# Altium PCB Stamp.PcbDoc
Units mm, origin at the board's own origin, x right, y up, seen from the top; angles counter-clockwise.
Board outline 27.56 x 27.81 mm, 4 copper layers (Top Layer, Int1 (GND), Int2 (PWR), Bottom Layer), stack 1.369 mm thick; 25 components, 37 nets, 122 pads, 64 vias.
Unrouted connection lines stored in the file: 28.
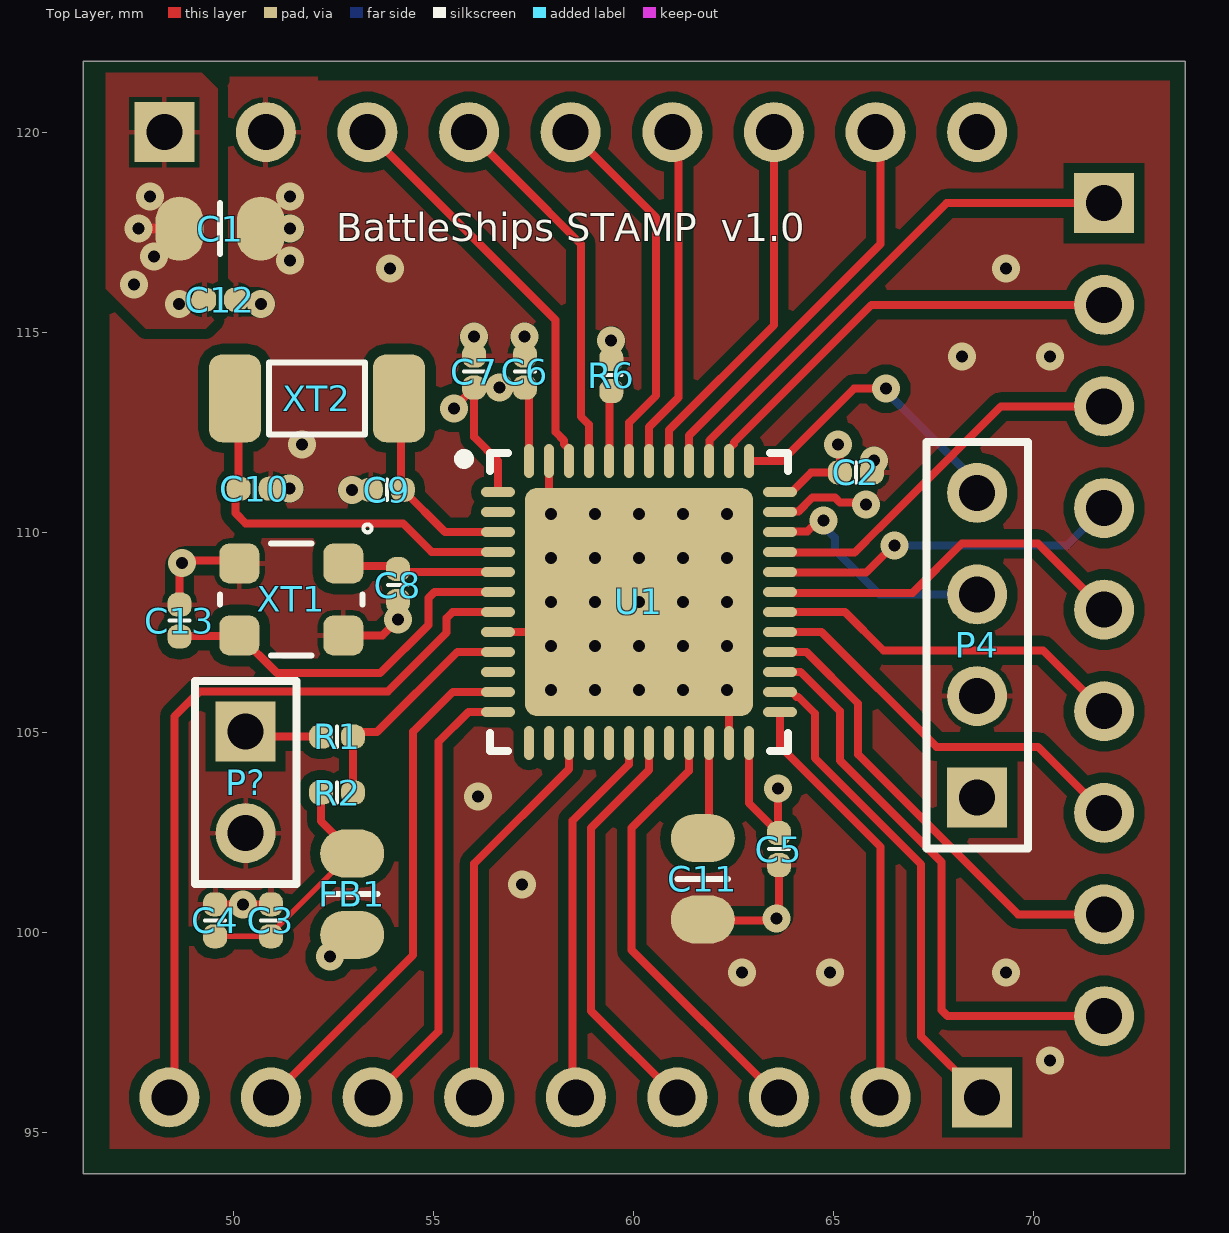
[diagram p0: Top Layer view]
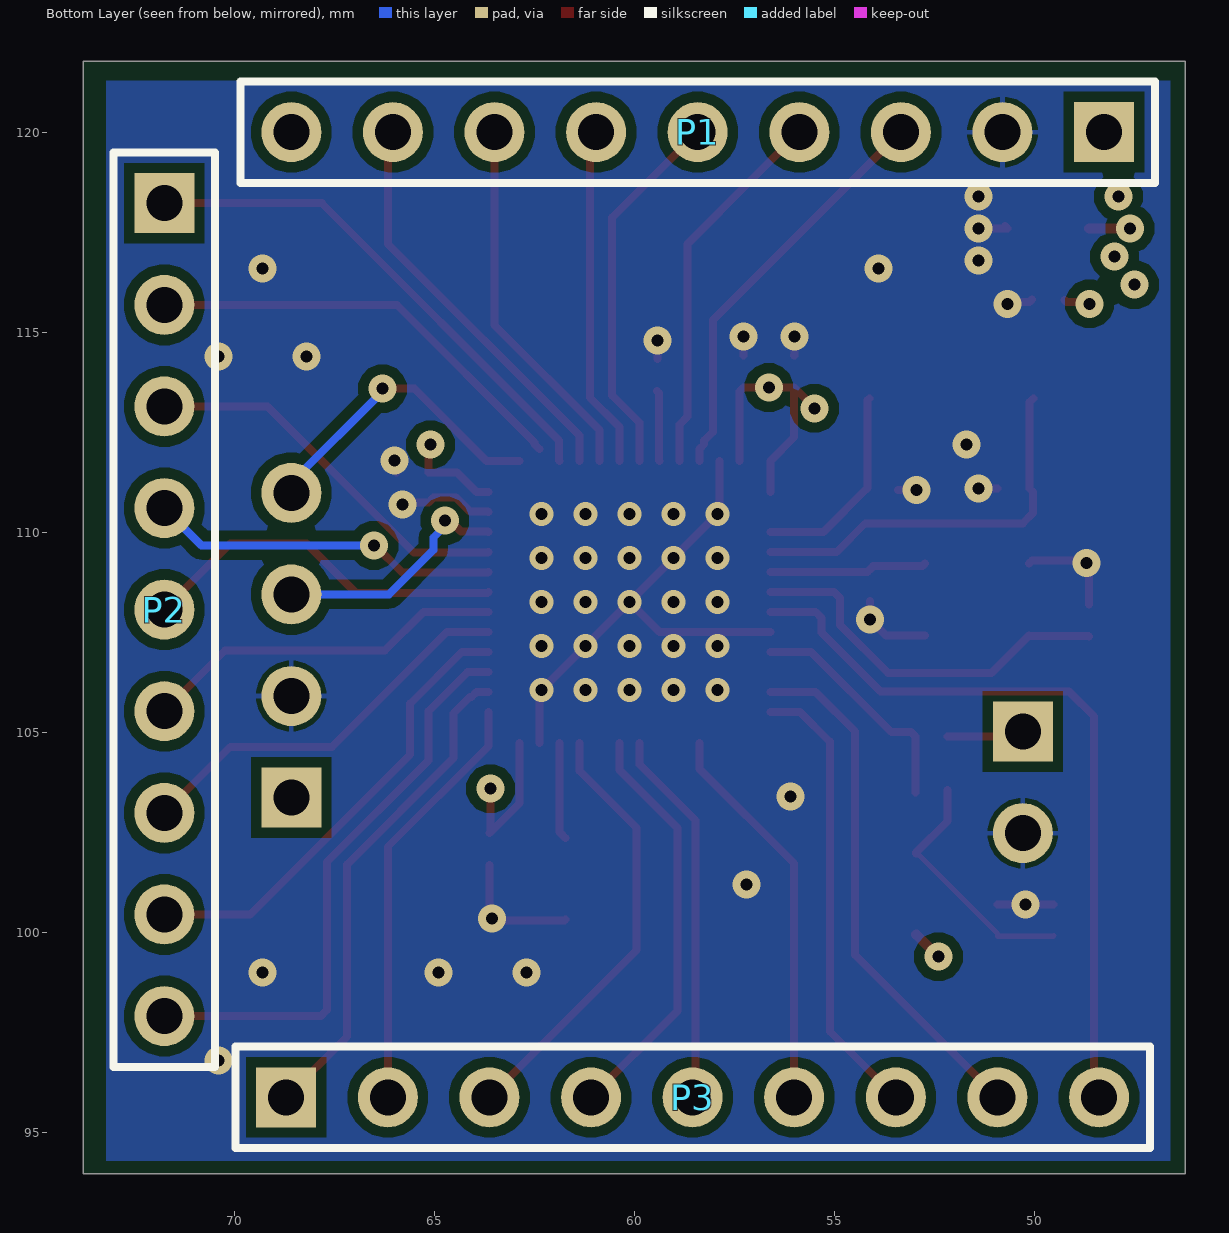
[diagram p1: Bottom Layer view, seen from below]
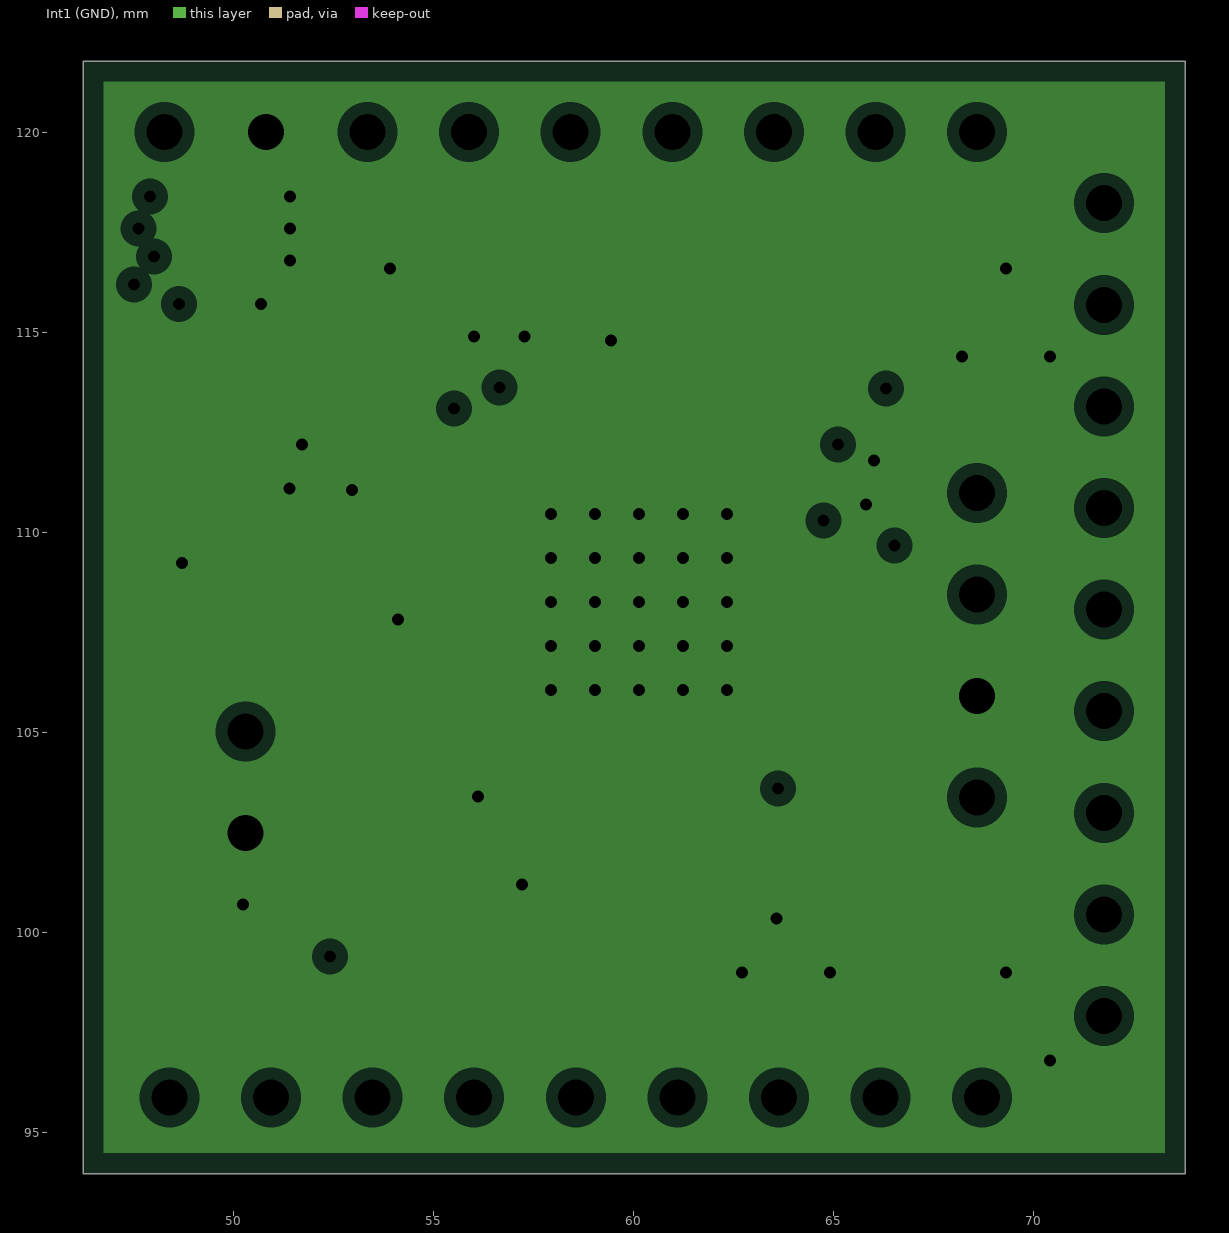
[diagram p2: Int1 (GND), clearances drawn from the general rule]
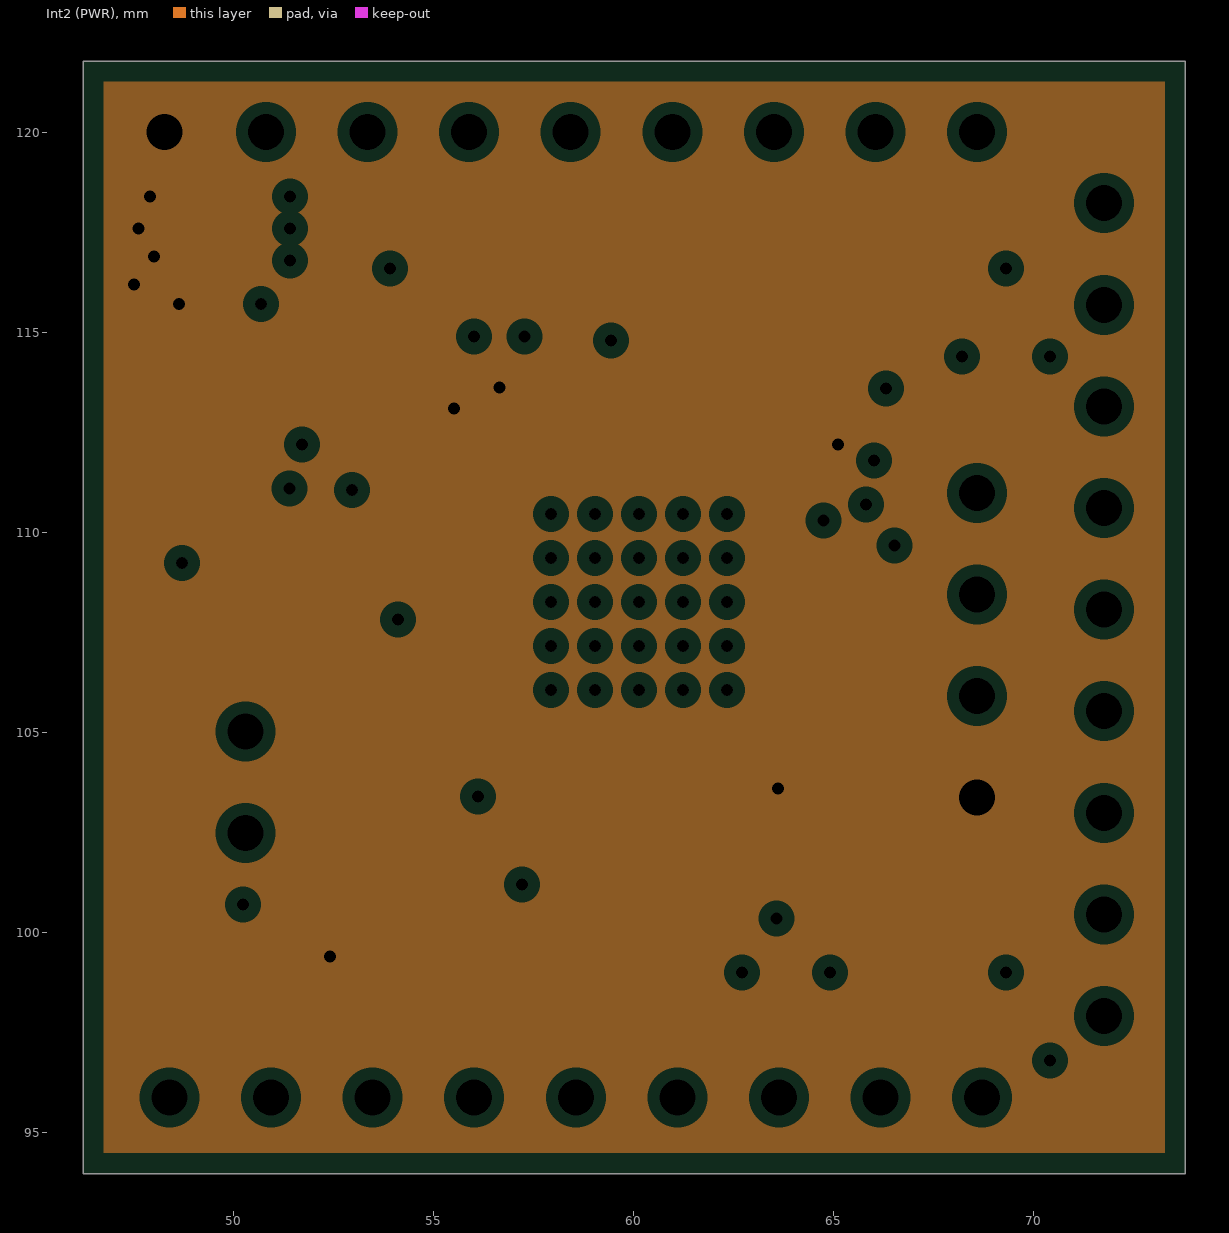
[diagram p3: Int2 (PWR), clearances drawn from the general rule]
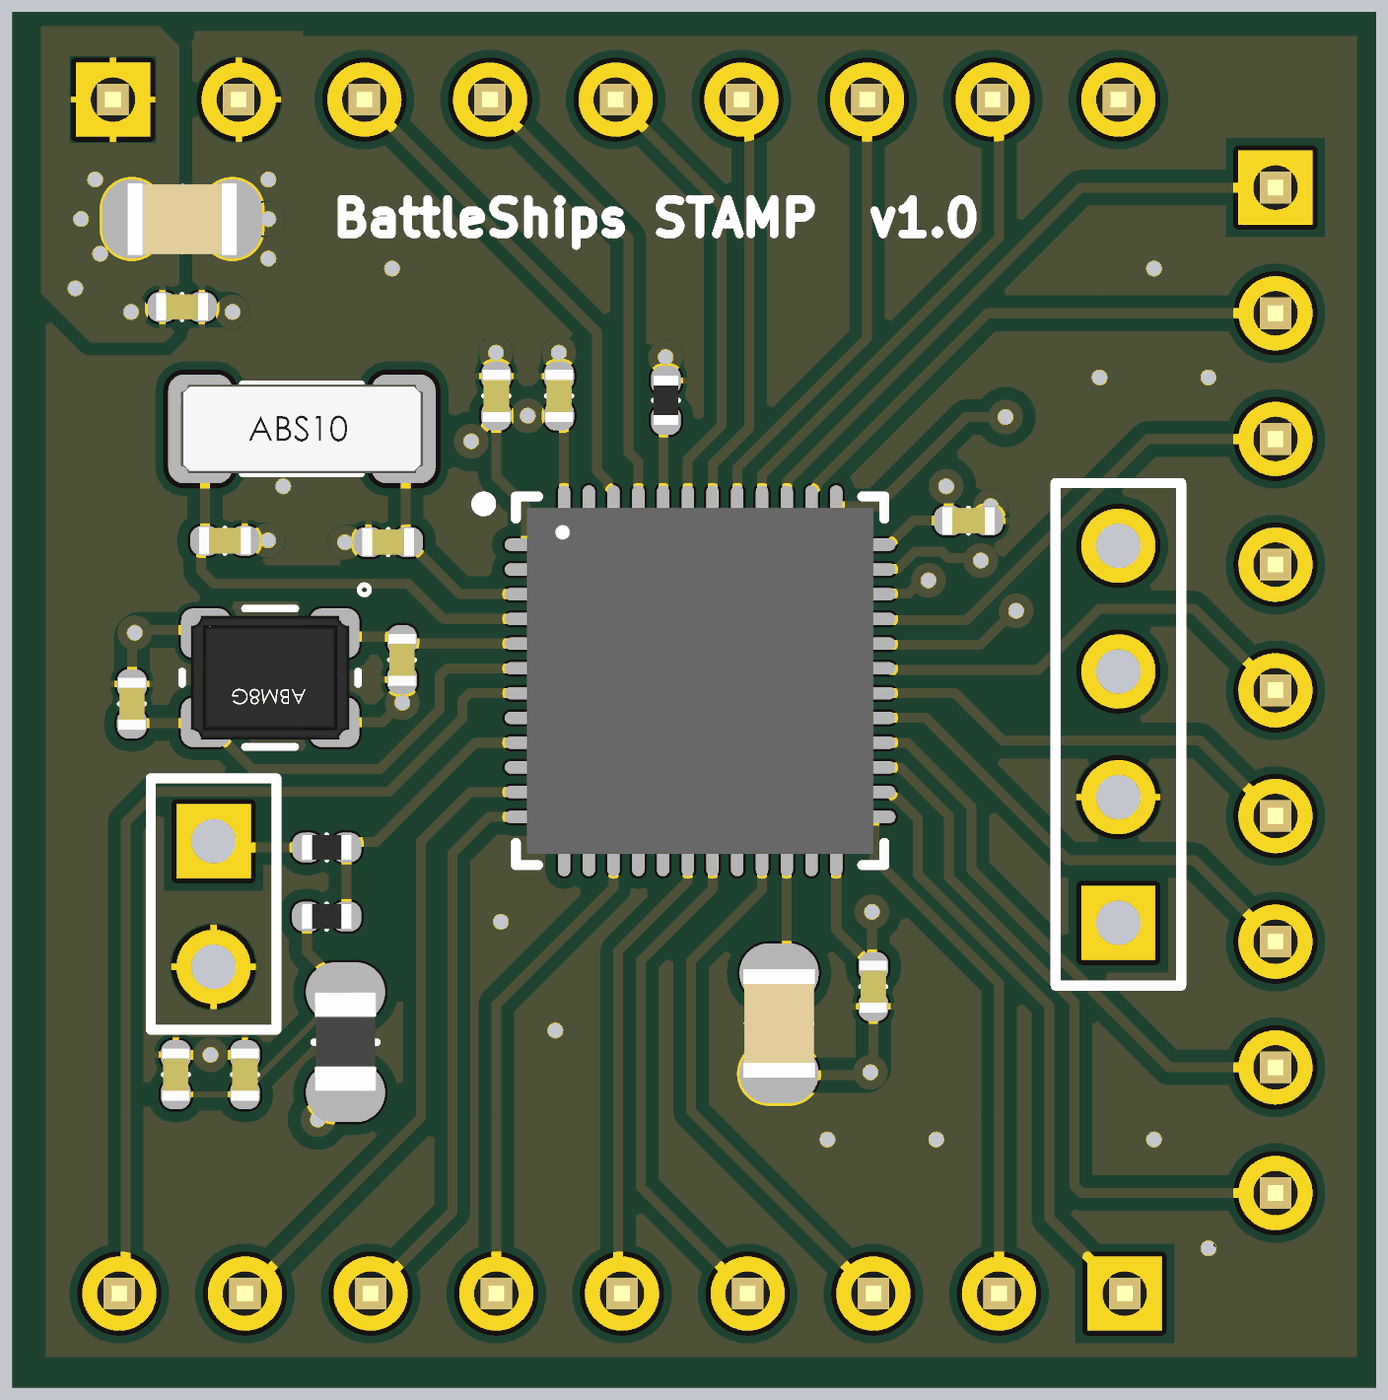
[diagram p4: 3D render of the assembled board from above, using the file's embedded part models]
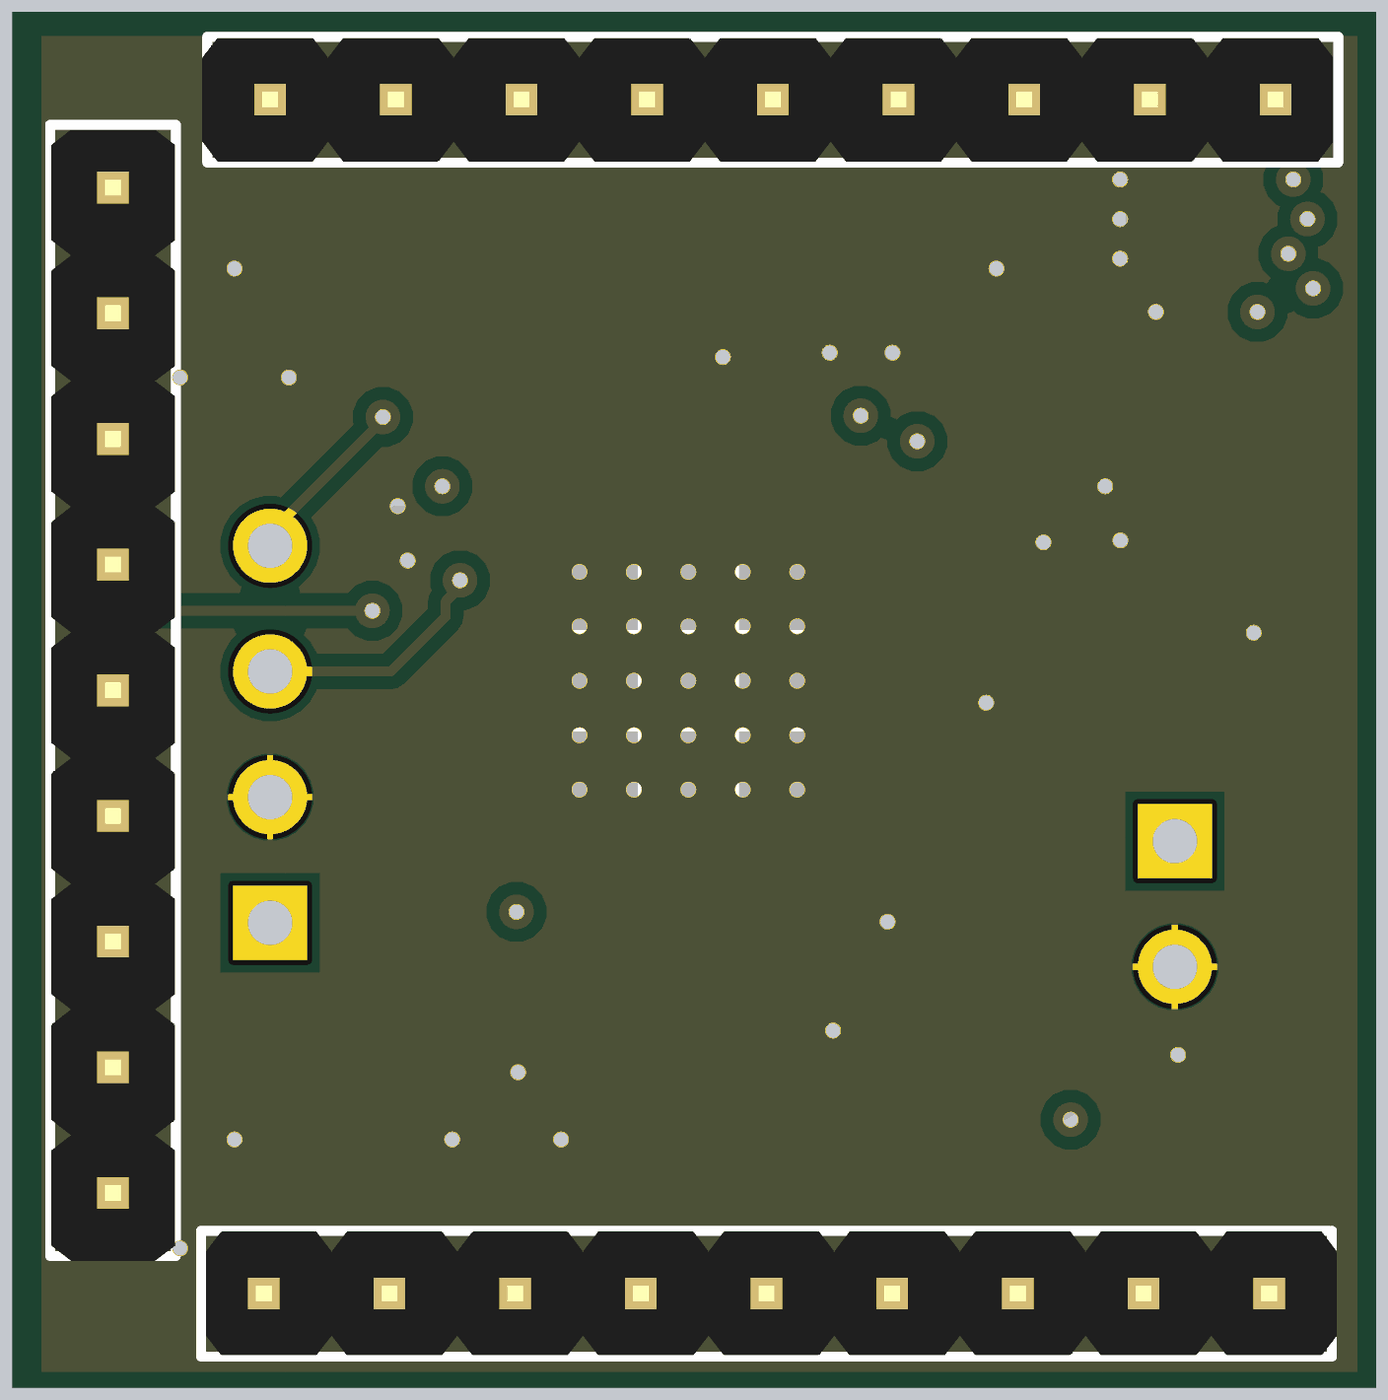
[diagram p5: 3D render of the assembled board from below, using the file's embedded part models]

## Layer stack, top to bottom
Top Solder: solder mask 0.0254, SM-001, Dk 4
Top Layer: signal copper 0.035
Dielectric 1: prepreg 0.1295, PP-017, Dk 4.3
Dielectric 2: prepreg 0.1295, PP-017, Dk 4.3
Int1 (GND): plane copper 0.035, net GND
Dielectric 3: core 0.7112, Core-039, Dk 4.8
Int2 (PWR): plane copper 0.035, net 3V3
Dielectric 4: prepreg 0.1295, PP-017, Dk 4.3
Dielectric 5: prepreg 0.1295, PP-017, Dk 4.3
Bottom Layer: signal copper 0.035
Bottom Solder: solder mask 0.0254, SM-001, Dk 4

## Board outline
46.228,93.98 46.228,121.793 73.787,121.793 73.787,93.98

## Design rules (kind name [scope] priority, off if disabled: settings)
BoardOutlineClearance [All] p1: gap=0.2 ignorepadtopadclearanceinfootprint=FALSE
Clearance [All] p1: gap=0.254 ignorepadtopadclearanceinfootprint=FALSE except(0.127: Arc-SMDPad Arc-THPad Arc-Via Arc-Text Track-SMDPad Track-THPad Track-Via Track-Text SMDPad-SMDPad SMDPad-THPad SMDPad-Via SMDPad-Text THPad-THPad THPad-Via THPad-Text Via-Via Via-Text Fill-Text Poly-Text Region-Text Text-Text; 0.203: Arc-Arc Arc-Track Track-Track)
ComponentClearance [All] p1: gap=0.127 collisioncheckmode=3 verticalgap=0.127 showdistances=TRUE
DiffPairsRouting [All] p1: maxlimit=0.254 minlimit=0.127 mostfreqgap=0.127 toplayer_minwidth=0.127 toplayer_maxwidth=25.4 toplayer_prefwidth=0.127 bottomlayer_minwidth=0.127 bottomlayer_maxwidth=25.4 bottomlayer_prefwidth=0.127 maxuncoupledlength=0.127
Height [All] p1: minheight=0 maxheight=1816.048 prefheight=1816.048
HoleSize [All] p1: absolutevalues=TRUE maxlimit=6.3 minlimit=0.2 maxpercent=80.000 minpercent=20.000
HoleToHoleClearance [All] p1: gap=0.25 allowstackedmicrovias=TRUE
LayerPairs [All] p1: enforce=FALSE
MinimumAnnularRing [All] p1: minimumring=0.12
MinimumSolderMaskSliver [All] p1: minsoldermaskwidth=0
PlaneClearance [All] p1: clearance=0.3
PlaneConnect PlaneConnectPowerPads [InPadClass('PowerPads')] p1: pad.planeconnectstyle=Relief pad.reliefexpansion=0.508 pad.reliefentries=4 pad.reliefconductorwidth=0.254 pad.reliefairgap=0.254 via.planeconnectstyle=Direct via.reliefexpansion=0.508 via.reliefentries=4 via.reliefconductorwidth=0.254 via.reliefairgap=0.254
PlaneConnect [All] p2: pad.planeconnectstyle=Relief pad.reliefexpansion=0.3 pad.reliefentries=4 pad.reliefconductorwidth=0.2 pad.reliefairgap=0.1 via.planeconnectstyle=Direct via.reliefexpansion=0.3 via.reliefentries=4 via.reliefconductorwidth=0.127 via.reliefairgap=0.254
PolygonConnect PolygonConnectPowerPads [All vs (InPadClass('PowerPads'))] p1: thpad.connectstyle=Relief thpad.reliefconductorwidth=0.254 thpad.reliefentries=4 thpad.polygonreliefangle="90 Angle" thpad.airgapwidth=0.254 smdpad.connectstyle=Relief smdpad.reliefconductorwidth=0.254 smdpad.reliefentries=4 smdpad.polygonreliefangle="90 Angle" smdpad.airgapwidth=0.254 via.connectstyle=Direct via.reliefconductorwidth=0.254 via.reliefentries=4 via.polygonreliefangle="90 Angle" via.airgapwidth=0.254
PolygonConnect [All] p2: thpad.connectstyle=Relief thpad.reliefconductorwidth=0.127 thpad.reliefentries=4 thpad.polygonreliefangle="90 Angle" thpad.airgapwidth=0.127 smdpad.connectstyle=Relief smdpad.reliefconductorwidth=0.127 smdpad.reliefentries=4 smdpad.polygonreliefangle="90 Angle" smdpad.airgapwidth=0.127 via.connectstyle=Direct via.reliefconductorwidth=0.127 via.reliefentries=4 via.polygonreliefangle="90 Angle" via.airgapwidth=0.254
RoutingVias [All] p1: holewidth=0.2 width=0.4 viastyle="Through Hole" minholewidth=0.2 minwidth=0.4 maxholewidth=0.6 maxwidth=1.27
SilkToSilkClearance [All] p1: silktosilkclearance=0
SilkToSolderMaskClearance [IsPad] p1: minsilkscreentomaskgap=0.127 clearancetoexposedcopper=TRUE
SolderMaskExpansion [All] p1: expansion=0.102 istentingtop=FALSE
Width [All] p1: maxlimit=25.4 minlimit=0.127 preferedwidth=0.127 minimp=50.000000 maximp=50.000000 favimp=50.000000
19 further rules are at their usual default settings.

## Components (designator, comment, footprint, x,y, rotation, side; value= is the part's Value field where it differs from the comment)
C1 "C_10UF_25V_X5R_0805_10" C_0805_2012 49.657,117.602 r0 top value=10uF
C2 "C_100NF_50V_X7R_0402_10" C_0402_1005 65.551,111.506 r0 top value=100nF
C3 "C_100NF_50V_X7R_0402_10" C_0402_1005 50.927,100.311 r90 top value=100nF
C4 "C_100NF_50V_X7R_0402_10" C_0402_1005 49.53,100.311 r90 top value=100nF
C5 "C_100NF_50V_X7R_0402_10" C_0402_1005 63.627,102.089 r270 top value=100nF
C6 "C_100NF_50V_X7R_0402_10" C_0402_1005 57.277,114.027 r90 top value=100nF
C7 "C_100NF_50V_X7R_0402_10" C_0402_1005 56.007,114.027 r90 top value=100nF
C8 "C_8P2F_50V_C0G_0402_3" C_0402_1005 54.102,108.693 r270 top value=8.2pF
C9 "C_15PF_50V_C0G_0402_5" C_0402_1005 53.823,111.074 r180 top value=15pF
C10 "C_15PF_50V_C0G_0402_5" C_0402_1005 50.521,111.1 r0 top value=15pF
C11 "C_10UF_25V_X5R_0805_10" C_0805_2012 61.722,101.346 r270 top value=4.7uF
C12 "C_100NF_50V_X7R_0402_10" C_0402_1005 49.657,115.824 r0 top value=100nF
C13 "C_8P2F_50V_C0G_0402_3" C_0402_1005 48.641,107.804 r90 top value=8.2pF
FB1 "MLZ2012M2R2HT000" FB_0805_2012 52.959,100.965 r90 top
P1 "826629-9" HEADER_M_1x9_2.54 48.26,120.015 r0 bottom
P2 "826629-9" HEADER_M_1x9_2.54 71.755,118.237 r270 bottom
P3 "826629-9" HEADER_M_1x9_2.54 68.707,95.885 r180 bottom
P4 "Header 4" HDR1X4 68.58,103.378 r90 top
P? "Header 2" HDR1X2 50.292,105.029 r270 top
R1 "R_0R_0402_1" R_0402_1005 52.578,104.902 r0 top value=0R
R2 "R_0R_0402_1" R_0402_1005 52.578,103.505 r0 top value=0R
R6 "R_1K_0402_1" R_0402_1005 59.436,113.938 r270 top value=1K
U1 "STM32F410CBU6" QFN50P700X700X100_HS-49N 60.127,108.27 r0 top
XT1 "TSX-3225 24.0000MF20G-AC" X_3.2x2.5 51.435,108.331 r180 top
XT2 "ABS10-32.768KHZ-1-T" ABS10_4.9X1.8 52.077,113.36 r0 top

## Footprints (in the part's own frame and the unit in brackets; to place one, negate y for a bottom-side part, rotate by r counter-clockwise, add the part's x,y. Pads: shape width x height; smd on the part's side, far side on the other; paste and mask are expansions set on the pad)
ABS10_4.9X1.8 [mm]
  rrect50% 1.3x2.2 smd: 1(-2.05,0) 2(2.05,0)
  silkscreen extent -1.2,-0.9 1.2,0.9, body extent -2.45,-0.9 2.45,0.9, height 1
C_0402_1005 [mm]
  rrect80% 0.6x0.6 smd mask+0.05: 1(-0.4,0) 2(0.4,0)
  silkscreen extent 0,-0.25 0,0.25, body extent -0.52,-0.27 0.53,0.28, height 0.55
C_0805_2012 [mm]
  oval 1.2x1.6 smd mask+0.05: 1(-1.016,0) 2(1.016,0)
  silkscreen extent 0,-0.64 0,0.64, body extent -1.1,-0.72 1.1,0.73, height 1.34
FB_0805_2012 [mm]
  oval 1.2x1.6 smd mask+0.05: 1(-1.016,0) 2(1.016,0)
  silkscreen extent 0,-0.64 0,0.64, body extent -0.99,-0.62 1.01,0.63, height 0.85
HDR1X2 [mm] "Connector; Header; 2 Position"
  rect 1.5x1.5 hole 0.9: 1(0,0)
  round 1.5 hole 0.9: 2(2.54,0)
  silkscreen extent -1.27,-1.27 3.81,1.27
HDR1X4 [mm] "Connector; Header; 4 Position"
  rect 1.5x1.5 hole 0.9: 1(0,0)
  round 1.5 hole 0.9: 2(2.54,0) 3(5.08,0) 4(7.62,0)
  silkscreen extent -1.27,-1.27 8.89,1.27
HEADER_M_1x9_2.54 [mm] "Connector; Header; 9 Position; Male"
  rect 1.5x1.5 hole 0.9: 1(0,0)
  round 1.5 hole 0.9: 2(2.54,0) 3(5.08,0) 4(7.62,0) 5(10.16,0) 6(12.7,0) 7(15.24,0) 8(17.78,0) 9(20.32,0)
  silkscreen extent -1.27,-1.27 21.59,1.27, body extent -1.17,-1.25 21.69,1.25, height 8.2
QFN50P700X700X100_HS-49N [mm] "QFN, 48-Leads, Body 7.00x7.00mm, Pitch 0.50mm, Thermal Pad 5.15x5.10mm, IPC Medium Density"
  oval 0.85x0.25 smd mask+0.05: 1(-3.525,2.75) 2(-3.525,2.25) 3(-3.525,1.75) 4(-3.525,1.25) 5(-3.525,0.75) 6(-3.525,0.25) 7(-3.525,-0.25) 8(-3.525,-0.75) 9(-3.525,-1.25) 10(-3.525,-1.75) 11(-3.525,-2.25) 12(-3.525,-2.75) 25(3.525,-2.75) 26(3.525,-2.25) 27(3.525,-1.75) 28(3.525,-1.25) 29(3.525,-0.75) 30(3.525,-0.25) 31(3.525,0.25) 32(3.525,0.75) 33(3.525,1.25) 34(3.525,1.75) 35(3.525,2.25) 36(3.525,2.75)
  oval 0.25x0.85 smd mask+0.05: 13(-2.75,-3.525) 14(-2.25,-3.525) 15(-1.75,-3.525) 16(-1.25,-3.525) 17(-0.75,-3.525) 18(-0.25,-3.525) 19(0.25,-3.525) 20(0.75,-3.525) 21(1.25,-3.525) 22(1.75,-3.525) 23(2.25,-3.525) 24(2.75,-3.525) 37(2.75,3.525) 38(2.25,3.525) 39(1.75,3.525) 40(1.25,3.525) 41(0.75,3.525) 42(0.25,3.525) 43(-0.25,3.525) 44(-0.75,3.525) 45(-1.25,3.525) 46(-1.75,3.525) 47(-2.25,3.525) 48(-2.75,3.525)
  rrect10% 5.7x5.7 smd paste-4 mask+0.05: 49(0,0)
  silkscreen extent -4.5,-3.73 3.73,3.72, body extent -3.5,-3.5 3.5,3.5, height 0.55
R_0402_1005 [mm]
  rrect80% 0.6x0.6 smd mask+0.05: 1(-0.4,0) 2(0.4,0)
  silkscreen extent 0,-0.25 0,0.25, body extent -0.5,-0.25 0.5,0.25, height 0.35
X_3.2x2.5 [mm] "Crystal resonator; 3.2mm x 2.5mm"
  rrect50% 1x1 smd mask+0.05: 1(-1.3,-0.9) 2(1.3,-0.9) 3(1.3,0.9) 4(-1.3,0.9)
  silkscreen extent -2,-1.88 1.78,1.4, body extent -1.6,-1.25 1.6,1.25, height 1.01

## Part data
C1: "Ceramic Capacitor", Capacitance=10uF, Case/Package=0805, Dielectric=X5R, Manufacturer="Samsung Electro-Mechanics", Manufacturer Part Number=CL21A106KAYNNNE, Max Operating Temperature=85°C, Supplier Part Number 1=187-CL21A106KAYNNNE, Tolerance=10%, Voltage Rating (DC)=25V, Height=1.35mm, HelpURL=https://pl.mouser.com/datasheet/2/585/MLCC-1837944.pdf, Manufacturer 2="Samsung Electro-Mechanics", Manufacturer Part Number 2=CL21A106KAYNNNE, Mount="Surface Mount", Part Number=C_10UF_25V_X5R_0805_10, RoHS=Compliant, Status=MK, Supplier 1=Mouser, Supplier 2=LCSC, Supplier Part Number 2=C15850
C2 C3 C4 C5 C6 C7 C12: "Ceramic Capacitor", Capacitance=100nF, Case/Package=0402, Dielectric=X7R, Manufacturer=TDK, Manufacturer Part Number=C1005X7R1H104K050BB, Max Operating Temperature=125°C, Supplier Part Number 1=810-C1005X7R1H104K, Tolerance=10%, Voltage Rating (DC)=50V, Height=500um, HelpURL=https://product.tdk.com/info/en/catalog/datasheets/mlcc_commercial_general_en.pdf?ref_disty=mouser, Mount="Surface Mount", Part Number=C_100NF_50V_X7R_0402_10, RoHS=Compliant, Status=MK, Supplier 1=Mouser
C8 C13: "Ceramic Capacitor", Capacitance=8.2pF, Case/Package=0402, Dielectric=C0G, Manufacturer="Taiyo Yuden", Manufacturer Part Number=UMK105CG8R2DV-F, Max Operating Temperature=125°C, Supplier Part Number 1=963-UMK105CG8R2DV-F, Tolerance=3%, Voltage Rating (DC)=50V, Height=500um, HelpURL=https://pl.mouser.com/datasheet/2/396/mlcc02_e-1307760.pdf, Mount="Surface Mount", Part Number=C_8P2F_50V_C0G_0402_3, RoHS=Compliant, Status=MK, Supplier 1=Mouser
C9 C10: "Ceramic Capacitor", Capacitance=15pF, Case/Package=0402, Dielectric=C0G, Manufacturer=Yageo, Manufacturer Part Number=CC0402JRNPO9BN150, Max Operating Temperature=125°C, Supplier Part Number 1=603-CC402JRNPO9BN150, Tolerance=5%, Voltage Rating (DC)=50V, Height=500um, HelpURL=http://datasheet.octopart.com/CC0402JRNPO9BN150-Yageo-datasheet-10406438.pdf, Mount="Surface Mount", Part Number=C_15PF_50V_C0G_0402_5, RoHS=Compliant, Supplier 1=Mouser
C11: "Ceramic Capacitor", Capacitance=4.7uF, Case/Package=0805, Dielectric=X5R, Manufacturer="Samsung Electro-Mechanics", Manufacturer Part Number=CL21A106KAYNNNE, Max Operating Temperature=85°C, Supplier Part Number 1=187-CL21A106KAYNNNE, Tolerance=10%, Voltage Rating (DC)=25V, Height=1.35mm, HelpURL=https://pl.mouser.com/datasheet/2/585/MLCC-1837944.pdf, Manufacturer 2="Samsung Electro-Mechanics", Manufacturer Part Number 2=CL21A106KAYNNNE, Mount="Surface Mount", Part Number=C_10UF_25V_X5R_0805_10, RoHS=Compliant, Status=MK, Supplier 1=Mouser, Supplier 2=LCSC, Supplier Part Number 2=C15850
FB1: "Ferrite Bead", Case/Package=0805, DC Resistance (DCR)=208m, Frequency=2MHz, Manufacturer=TDK, Max Current Rating=600mA, Max Operating Temperature=125°C, Supplier Part Number 1=810-MLZ2012M2R2HT000, Tolerance=20, Box=412, Height=1.45mm, HelpURL=https://product.tdk.com/info/en/catalog/datasheets/inductor_commercial_decoupling_mlz2012_en.pdf?ref_disty=mouser, Impedance=30, Manufacturer Part Number=MLZ2012M2R2HT000, Mount="Surface Mount", Part Number=MLZ2012M2R2HT000, RoHS=Compliant, Status=MK, Stock=15, Supplier 1=Mouser
P1 P2 P3: "Header, 9-Pin", Manufacturer="TE Connectivity", Max Operating Temperature=0°C, Gender=Male, HelpURL=http://sigma.octopart.com/12110114/technical_drawing/TE-Connectivity-826629-9.pdf, Manufacturer Part Number=826629-9, Mount="Through Hole", Number of Pins=9, Number of Rows=1, Orientation=Straight, Part Number=826629-9, Pitch=2.54mm
P4: "Header, 4-Pin", LatestRevisionDate=17-Jul-2002, LatestRevisionNote="Re-released for DXP Platform.", Publisher="Altium Limited"
P?: "Header, 2-Pin", LatestRevisionDate=17-Jul-2002, LatestRevisionNote="Re-released for DXP Platform.", Publisher="Altium Limited"
R1 R2: "Thick Film Resistor", Case/Package=0402, Manufacturer=Yageo, Manufacturer 2="Uniroyal Elec", Manufacturer Part Number=RC0402FR-070RL, Manufacturer Part Number 2=0402WGF0000TCE, Max Operating Temperature=155°C, Power Rating=63mW, Resistance=0R, Supplier Part Number 1=603-RC0402FR-070RL, Tolerance=1%, Voltage Rating (DC)=50V, Height=350um, HelpURL=http://datasheet.octopart.com/2176049-1-TE-Connectivity---AMP-datasheet-11120217.pdf, Mount="Surface Mount", Part Number=R_0R_0402_1, RoHS=Compliant, Stats=MK, Supplier 1=Mouser, Supplier 2=LCSC, Supplier Part Number 2=C17168
R6: "Thick Film Resistor", Case/Package=0402, Manufacturer=Yageo, Manufacturer 2="Uniroyal Elec", Manufacturer Part Number=RC0402FR-7D1KL, Manufacturer Part Number 2=0402WGF1001TCE, Max Operating Temperature=155°C, Power Rating=63mW, Resistance=1K, Supplier Part Number 1=603-RC0402FR-7D1KL, Tolerance=1%, Voltage Rating (DC)=50V, Height=350um, HelpURL=https://pl.mouser.com/datasheet/2/447/PYu-RC_Group_51_RoHS_L_10-1664068.pdf, Mount="Surface Mount", Part Number=R_1K_0402_1, RoHS=Compliant, Stats=MK, Supplier 1=Mouser, Supplier 2=LCSC, Supplier Part Number 2=C11702
U1: "IC MCU 32BIT 128KB FLASH 48QFPN", Case/Package=UFQFPN, Manufacturer=STMicroelectronics, Max Frequency=100MHz, Max Operating Temperature=85°C, Max Supply Voltage=3.6V, Min Supply Voltage=1.7V, Supplier Part Number 1=511-STM32F410CBU6, Box=330, Core Architecture=ARM, Height=0.55, HelpURL=https://pl.mouser.com/datasheet/2/389/stm32f410cb-956320.pdf, Manufacturer Part Number=STM32F410CBU6, Memory Size=128kB, Memory Type=FLASH, Mount="Surface Mount", Number of Pins=48, Part Number=STM32F410CBU6, RAM Size=32kB, RoHS=Compliant, Status=MK, Stock=2, Supplier 1=Mouser
XT1: "Resonator Ceramic", Frequency=24MHz, Frequency Tolerance=10ppm, Manufacturer=Epson, Manufacturer Part Number="TSX-3225 24.0000MF20G-AC0", Max Operating Temperature=75C, Supplier Part Number 1=732-322524F20GAC0, Box=236, Height=0.6mm, HelpURL=https://pl.mouser.com/datasheet/2/137/FA_238_en-932914.pdf, Mount="Surface Mount", Number of Pins=4, Part Number="TSX-3225 24.0000MF20G-AC", RoHS=Compliant, Stock=21, Supplier 1=Mouser
XT2: "Crystal", Frequency=32.768kHz, Frequency Tolerance=10ppm, Manufacturer=Abracon, Max Operating Temperature=85, Supplier Part Number 1=815-ABS10-32.7K-1-T, Box=375, Height=1mm, HelpURL=https://pl.mouser.com/datasheet/2/3/ABS10-17136.pdf, Manufacturer Part Number=ABS10-32.768KHZ-1-T, Mount="Surface Mount", Number of Pins=2, Part Number=ABS10-32.768KHZ-1-T, RoHS=Compliant, Stock=28, Supplier 1=Mouser

## Via types
v1: diameter 0.7, hole 0.3, Top Layer to Bottom Layer, tented both sides, 39 vias
v2: diameter 0.6, hole 0.3, Top Layer to Bottom Layer, tented both sides, 25 vias

## Nets (pads, with @x,y where several pads share a name; then routed paths per layer and width w, separated by ;. In a path a pad name is that pad's centre, name@x,y a point inside that pad or via, vN(x,y) a via of type N, cw(c..) or ccw(c..) an arc to the next point about the centre after c; other vN are vias at no path point)
3V3: C1.1 C2.1 C5.1 C6.1 C7.1 C12.1 FB1.1 P1.1 P4.1 U1.1 U1.24 U1.36 U1.48 | length 15.9
  Top Layer w0.2: P1.1 P1.1@48.641,119.634 ; v1(48.624,115.724) 48.672,115.772 49.205,115.772 C12.1@49.25,115.817 ; v1@55.5,113.1 55.5,113.12 C7.1 ; U1.1 56.602,111.796 56.007,112.391 C7.1 ; U1.48 57.375,111.797 57.375,113.529 C6.1 C7.1 ; U1.24 62.877,103.239 C5.1 63.6,102.516 v1(63.6,103.6) ; U1.36 63.948,111.02 64.434,111.506 C2.1 65.151,112.149 v1(65.1,112.2)
  Top Layer w0.254: v1(47.613,117.602) C1.1 ; v1(52.4,99.4) 52.949,99.949 FB1.1
  other v1: 55.5,113.11 56.642,113.627 47.5,116.2 48,116.9 47.9,118.4
ADC1_IN1: P3.8 U1.11 | length 13.1
  Top Layer w0.2: P3.8 54.483,99.441 54.483,105.029 55.474,106.02 U1.11
ADC1_IN2: P3.7 U1.12 | length 11.4
  Top Layer w0.2: P3.7 55.118,97.536 55.118,104.775 55.863,105.52 U1.12
GND: C1.2 C2.2 C3.2 C4.2 C5.2 C6.2 C7.2 C8.2 C9.2 C10.2 C11.2 C12.2 C13.2 P1.2 P4.2 P?.2 R6.1 U1.8 U1.23 U1.35 U1.47 U1.49 XT1.2 XT1.4 | length 28.5
  Top Layer w0.2: C13.2 48.641,109.183 48.758,109.3 50.066,109.3 XT1.2 ; C4.2 C3.2 ; C12.2@50.064,115.831 50.123,115.772 50.628,115.772 v1(50.676,115.724) ; C1.2@50.736,117.665 C1.2 50.675,117.6 v1(51.4,117.6) ; P1.2@50.736,119.951 P1.2 ; C10.2@50.928,111.107 v1(51.394,111.107) ; XT1.4 53.711,107.431 v1(54.107,107.827) C8.2@54.107,108.293 ; v1(52.95,111.067) C9.2@53.416,111.067 ; v1(56,114.9) 56,114.434 C7.2 ; U1.8 59.377,107.52 v2(60.127,108.27) ; C6.2@57.27,114.434 v1(57.27,114.9) ; U1.47 57.877,110.52 v2(57.927,110.47) v2(59.027,109.37) v2(60.127,108.27) ; R6.1@59.429,114.345 v1(59.429,114.811) ; C11.2 61.752,100.3 63.51,100.3 63.627,100.417 C5.2 ; U1.23 62.377,106.02 v2(62.327,106.07) v2(61.227,107.17) v2(60.127,108.27) ; U1.35 63.662,110.53 64.114,110.53 64.461,110.877 65.024,110.877 65.15,110.751 65.749,110.751 v1(65.8,110.7) ; C2.2 66,111.555 v1(66,111.8)
  other v1: 70.4,96.8 62.7,99 64.9,99 69.3,99 63.568,100.359 50.228,100.711 57.2,101.2 56.1,103.4 48.7,109.241 51.7,112.2 68.2,114.4 70.4,114.4 53.9,116.6 69.3,116.6 51.4,116.8 51.4,118.4
  other v2: 57.927,106.07 59.027,106.07 60.127,106.07 61.227,106.07 57.927,107.17 59.027,107.17 60.127,107.17 62.327,107.17 57.927,108.27 59.027,108.27 61.227,108.27 62.327,108.27 57.927,109.37 60.127,109.37 61.227,109.37 62.327,109.37 59.027,110.47 60.127,110.47 61.227,110.47 62.327,110.47
I2C1_SCL: P1.6 U1.42 | length 8.6
  Top Layer w0.2: U1.42 60.377,112.641 61.117,113.381 61.117,119.858 P1.6
I2C1_SDA: P1.5 U1.43 | length 9.4
  Top Layer w0.2: P1.5 60.558,117.877 60.558,113.432 59.877,112.751 U1.43
I2C2_SCL: P3.3 U1.21 | length 11
  Top Layer w0.2: U1.21 61.377,104.049 59.944,102.616 59.944,99.568 P3.3
I2C2_SDA: P2.1 U1.39 | length 12.8
  Top Layer w0.2: U1.39 61.886,111.804 61.886,112.305 67.818,118.237 P2.1
I2S5_CK: P3.5 U1.18 | length 9.5
  Top Layer w0.2: P3.5 58.471,95.961 58.471,102.805 59.875,104.21 59.875,104.743 U1.18
I2S5_SD: P2.5 U1.31 | length 9.3
  Top Layer w0.2: U1.31 63.675,108.497 63.962,108.497 63.965,108.494 66.965,108.494 68.199,109.728 70.104,109.728 P2.5
I2S5_WS: P3.4 U1.19 | length 10.4
  Top Layer w0.2: U1.19 60.377,104.065 58.928,102.616 58.928,98.044 P3.4
NetC3_1: C3.1 C4.1 FB1.2 R2.1 | length 6.3
  Top Layer w0.127: C4.1@49.511,99.93 C4.1 C3.1 50.927,99.982 52.926,101.981 FB1.2
  Top Layer w0.2: R2.1@52.178,103.566 R2.1 52.178,102.787 52.959,102.006 FB1.2
NetC8_1: C8.1 U1.5 XT1.1 | length 4
  Top Layer w0.2: XT1.1 52.804,109.162 54.033,109.162 C8.1 54.173,109.022 56.6,109.022 U1.5
NetC9_1: C9.1 U1.3 XT2.2 | length 5.1
  Top Layer w0.2: XT2.2 54.175,113.313 54.175,111.122 C9.1 55.277,110.02 U1.3
NetC10_1: C10.1 U1.4 XT2.1 | length 9.9
  Top Layer w0.2: XT2.1 50.121,113.267 C10.1 50.038,111.017 50.038,110.49 50.292,110.236 54.229,110.236 54.945,109.52 U1.4
NetC11_1: C11.1 U1.22 | length 2.4
  Top Layer w0.2: C11.1 61.875,102.515 61.875,104.743 U1.22
NetC13_1: C13.1 U1.6 XT1.3 | length 9.6
  Top Layer w0.2: C13.1 48.655,107.418 50.122,107.418 XT1.3 51.076,106.49 53.658,106.49 54.864,107.696 54.864,108.371 55.013,108.52 U1.6
NetR1_2: R1.2 R2.2 U1.9 | length 5.9
  Top Layer w0.2: R2.2 R1.2 53.091,105.015 53.58,105.015 55.585,107.02 U1.9
NetR6_2: R6.2 U1.44 | length 1.8
  Top Layer w0.2: U1.44 59.386,111.804 59.386,113.488 R6.2
PA8: P2.7 U1.29 | length 10
  Top Layer w0.2: U1.29 64.692,107.52 67.564,104.648 70.104,104.648 P2.7
PA9: P2.6 U1.30 | length 9.1
  Top Layer w0.2: U1.30 65.278,108.02 66.237,107.061 70.231,107.061 P2.6
PA11: P2.4 U1.32 | length 8.8
  Top Layer w0.2: U1.32 63.662,109.01 63.997,109.01 64.007,109 65.8,109 66.484,109.684 v1(66.514,109.684)
  Bottom Layer w0.2: v1(66.514,109.684) 70.822,109.684 P2.4
PA12: P2.3 U1.33 | length 9.6
  Top Layer w0.2: U1.33 63.662,109.51 63.997,109.51 64.007,109.5 65.513,109.5 66.136,110.123 66.139,110.123 69.173,113.157 P2.3
PA15: P2.2 U1.38 | length 10.9
  Top Layer w0.2: U1.38@62.379,112.093 62.498,112.212 62.498,112.252 65.943,115.697 P2.2
PB8: P1.4 U1.45 | length 9.5
  Top Layer w0.2: P1.4 57.068,118.827 58.674,117.221 58.674,112.903 58.877,112.7 U1.45
PB9: P1.3 U1.46 | length 10.3
  Top Layer w0.2: P1.3 58.039,115.316 58.039,112.522 58.256,112.305 58.256,112.212 58.377,112.091 U1.46
PB12: P3.2 U1.25 | length 10.7
  Top Layer w0.2: U1.25 63.652,104.664 66.167,102.149 P3.2
RST: P3.9 U1.7 | length 19
  Top Layer w0.2: P3.9 48.514,96.012 48.514,105.41 49.137,106.033 53.848,106.033 55.321,107.507 55.321,107.871 55.47,108.02 U1.7
SPI1_MISO: P1.8 U1.40 | length 10.3
  Top Layer w0.2: U1.40 61.377,112.431 66.167,117.221 66.167,119.888 P1.8
SPI1_MOSI: P1.7 U1.41 | length 9.3
  Top Layer w0.2: U1.41 60.877,112.566 63.5,115.189 P1.7
SPI1_SCK: P3.6 U1.15 | length 9.8
  Top Layer w0.2: P3.6 56.007,101.727 58.375,104.095 58.375,104.743 U1.15
SPI2_MISO: P2.9 U1.27 | length 14.6
  Top Layer w0.2: U1.27 63.654,106.518 64.17,106.518 65.151,105.537 65.151,104.305 67.691,101.765 67.691,98.066 67.84,97.917 P2.9
SPI2_MOSI: P2.8 U1.28 | length 11.6
  Top Layer w0.2: U1.28 63.654,107.018 64.317,107.018 65.608,105.726 65.608,104.456 69.608,100.457 P2.8
SPI2_SCK: P3.1 U1.26 | length 12.4
  Top Layer w0.2: U1.26 63.948,106.02 64.069,105.899 64.109,105.899 64.522,105.486 64.522,104.364 67.183,101.703 67.183,97.409 P3.1
SWCLK: P4.4 U1.37 | length 7.7
  Top Layer w0.2: U1.37 63.698,111.795 65.503,113.6 v1(66.3,113.6)
  Bottom Layer w0.2: v1(66.3,113.6) 66.3,113.532 68.58,111.252 P4.4
SWDIO: P4.3 U1.34 | length 6.1
  Top Layer w0.2: U1.34 63.662,110.03 64.336,110.03 64.606,110.3 v1(64.741,110.3)
  Bottom Layer w0.2: v1(64.741,110.3) 64.741,110.165 65.03,109.876 65.03,109.57 66.142,108.458 P4.3
VREF: P?.1 R1.1 | length 1.9
  Top Layer w0.2: P?.1 50.419,104.902 R1.1
pads on no net: P1.9 U1.2 U1.10 U1.13 U1.14 U1.16 U1.17 U1.20

## Polygon pours and split planes (outlines as drawn)
GND on Bottom Layer "GND_L04_P003" (solid, pour order 3): 46.6,121.3 73.2,121.3 73.2,94.3 46.6,94.3
GND on Top Layer "GND_L01_P002" (solid, pour order 2): 46.9,121.3 73.4,121.3 73.4,94.6 46.9,94.6
GND on Top Layer "GND_L01_P001" (solid, pour order 1): 49.9,121.4 52.1,121.4 52.1,115.2 52,115.1 51.9,115.2 49.8,115.2
3V3 on Top Layer "3V3_L01_P000" (solid, pour order 0): 46.8,121.5 49.2,121.5 49.6,121.1 49.6,115.4 49.3,115.1 47.8,115.1 46.8,116.1
3V3 on Int2 (PWR) (split plane): 73.277,94.49 46.738,94.49 46.738,121.283 73.277,121.283
GND on Int1 (GND) (split plane): 73.277,94.49 46.738,94.49 46.738,121.283 73.277,121.283

## Silkscreen, mask and mechanical layers (free items; w line width, h text height)
Top Overlay:
  text "BattleShips STAMP  v1.0" at 52.554,117.287 h0.7
Mechanical 1:
  the board outline again, w1.2